# EAGLE board cpu2 (EAGLE 5.00)
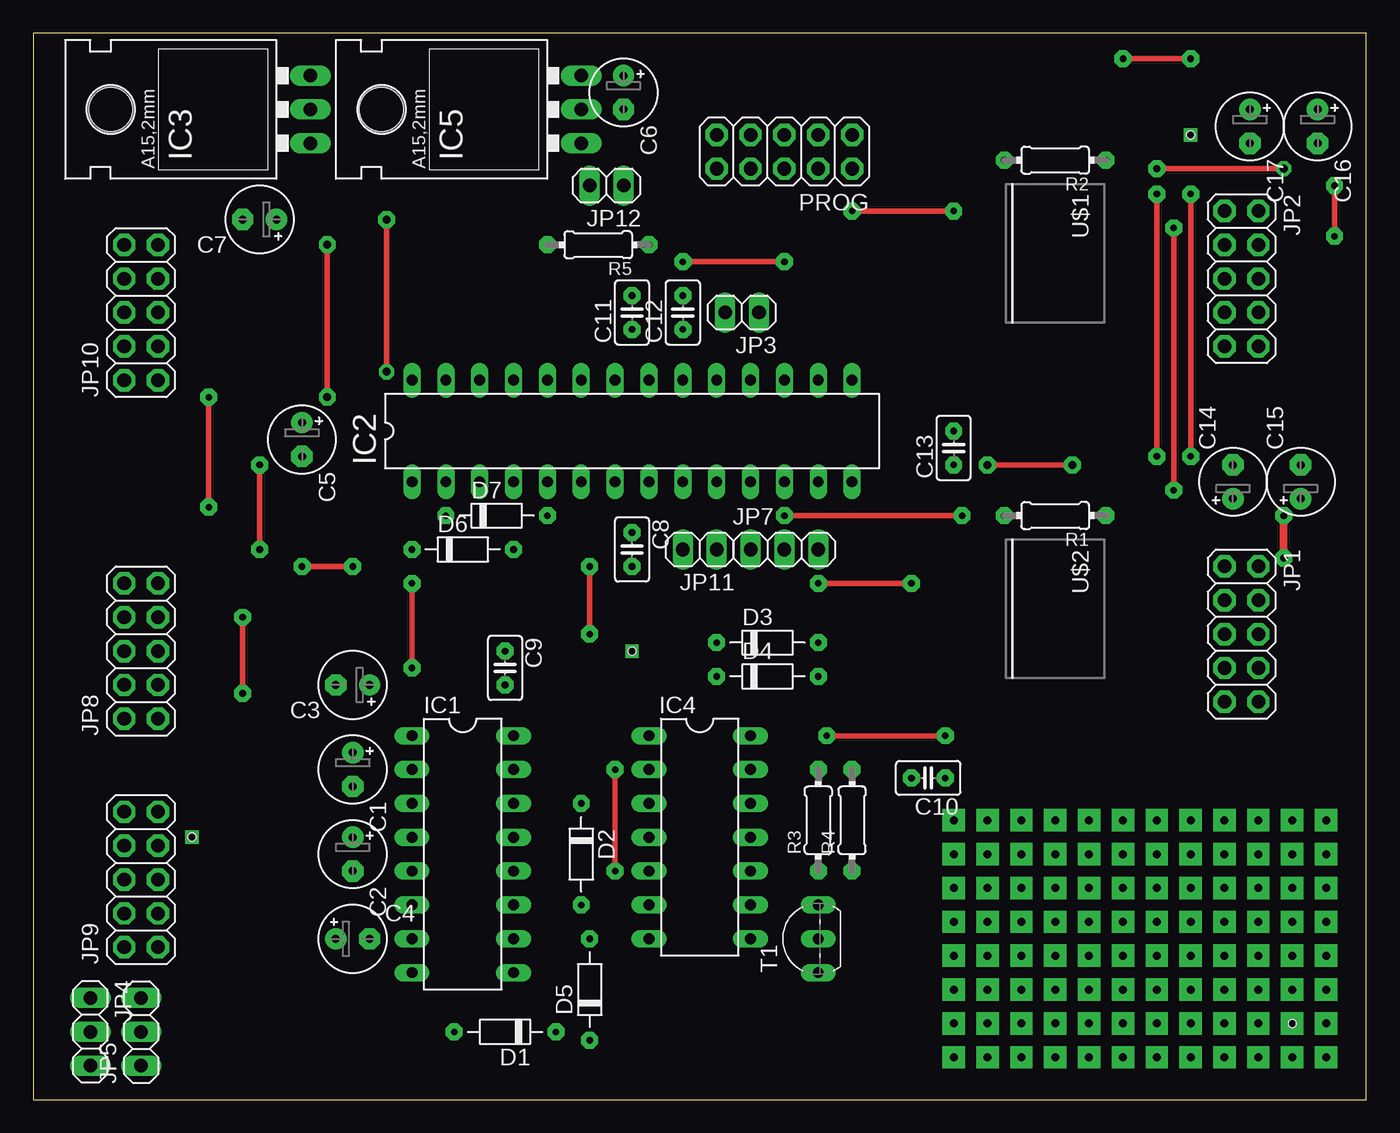
[diagram p0: board, top side]
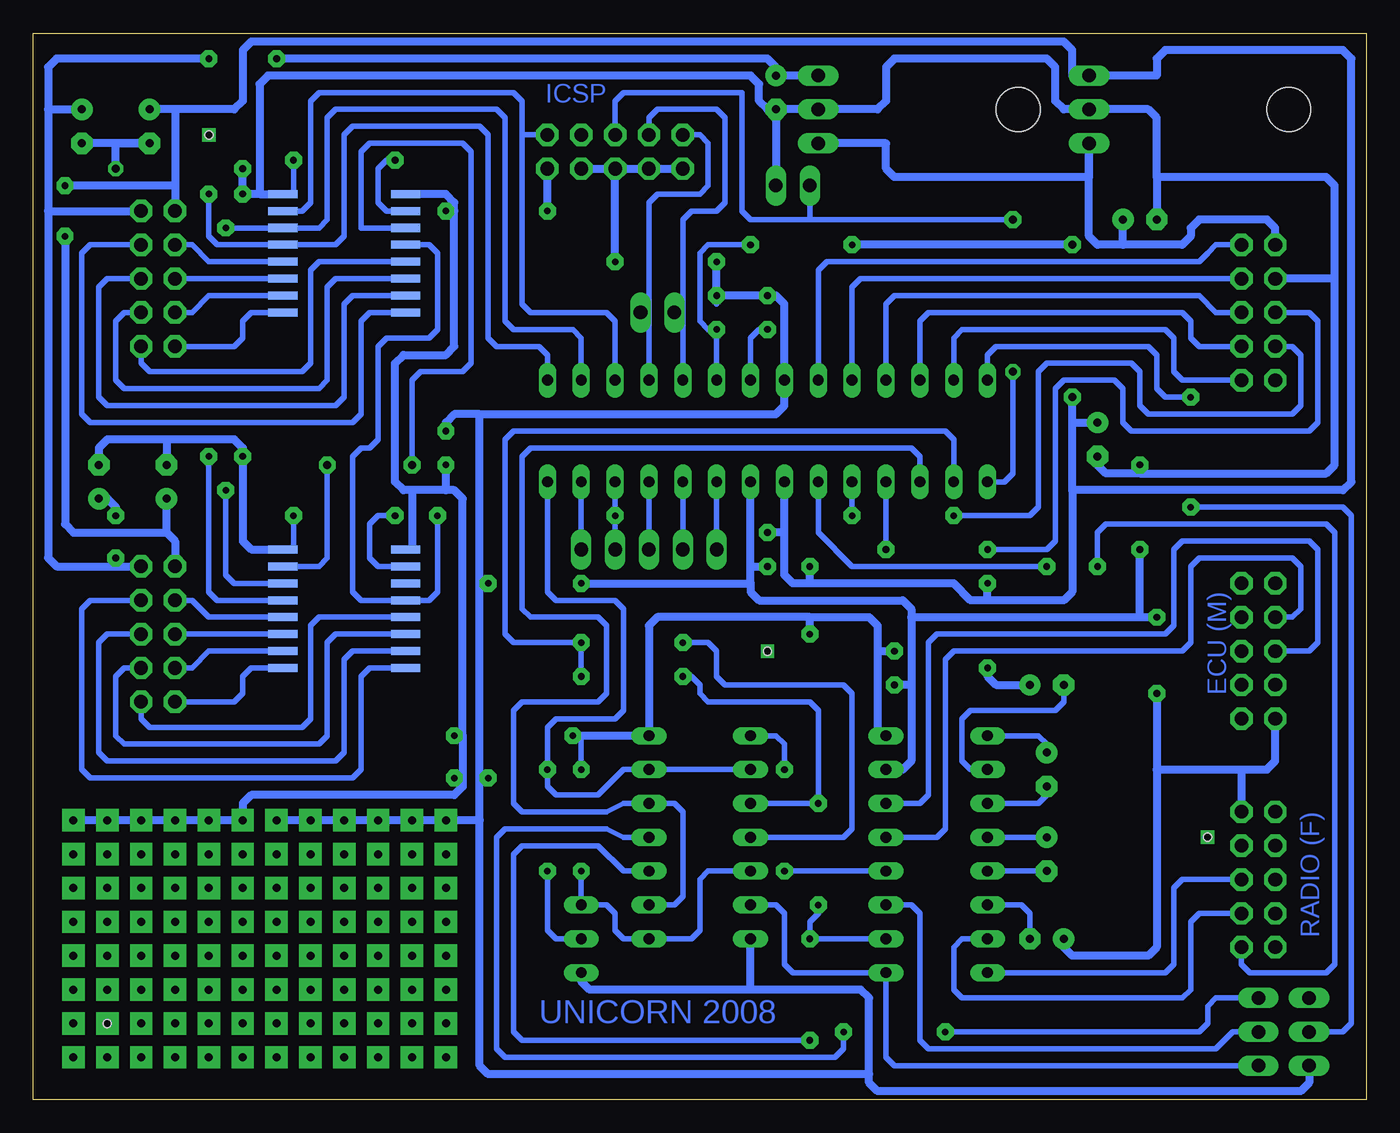
[diagram p1: board, bottom side, seen from below]

Size 100 x 80 mm. Coordinates in mm from the lower left corner, seen from the top.
Outline: 0,0 100,0 100,80 0,80 0,0
Copper layers (1*16): Top 0.035mm / dielectric 1.5mm / Bottom 0.035mm
Design rules "default": minimum track width 10mil, minimum drill 24mil, track to track 8mil, track to pad 8mil, pad to pad 8mil, via to via 8mil, smd to smd 8mil, copper to edge 40mil, drill to drill 8mil, minimum pad ring 10mil, minimum via ring 8mil, stop-mask expansion 4mil, vias tented up to drill 0mil, thermal gap 10mil
Holes 0.6 mm at 94.45,5.71 86.83,72.38 44.92,33.65 11.9,19.68

## Footprints (pad centres in the part's own frame; a part is rotated, then mirrored left to right if it is on the bottom)
E2,5-5 = drill 0.6 pad 1.6 round: + -1.27,0 | drill 0.6 pad 1.6 octagon: - 1.27,0
C025-025X050 = drill 0.5 pad 1.27 octagon: 1 -1.27,0; 2 1.27,0
D-7.5 = drill 0.5 pad 1.27 octagon: A 3.81,0; C -3.81,0
DIL16 = drill 0.813 long: 1 -8.89,-3.81; 2 -6.35,-3.81; 3 -3.81,-3.81; 4 -1.27,-3.81; 5 1.27,-3.81; 6 3.81,-3.81; 7 6.35,-3.81; 8 8.89,-3.81; 9 8.89,3.81; 10 6.35,3.81; 11 3.81,3.81; 12 1.27,3.81; 13 -1.27,3.81; 14 -3.81,3.81; 15 -6.35,3.81; 16 -8.89,3.81
DIL28-3 = drill 0.813 long: 1 -16.51,-3.81; 2 -13.97,-3.81; 3 -11.43,-3.81; 4 -8.89,-3.81; 5 -6.35,-3.81; 6 -3.81,-3.81; 7 -1.27,-3.81; 8 1.27,-3.81; 9 3.81,-3.81; 10 6.35,-3.81; 11 8.89,-3.81; 12 11.43,-3.81; 13 13.97,-3.81; 14 16.51,-3.81; 15 16.51,3.81; 16 13.97,3.81; 17 11.43,3.81; 18 8.89,3.81; 19 6.35,3.81; 20 3.81,3.81; 21 1.27,3.81; 22 -1.27,3.81; 23 -3.81,3.81; 24 -6.35,3.81; 25 -8.89,3.81; 26 -11.43,3.81; 27 -13.97,3.81; 28 -16.51,3.81
78XXL = drill 1.016 long: GND 0,-3.81; IN -2.54,-3.81; OUT 2.54,-3.81 | hole 3.302: 0,11.176
DIL14 = drill 0.813 long: 1 -7.62,-3.81; 2 -5.08,-3.81; 3 -2.54,-3.81; 4 0,-3.81; 5 2.54,-3.81; 6 5.08,-3.81; 7 7.62,-3.81; 8 7.62,3.81; 9 5.08,3.81; 10 2.54,3.81; 11 0,3.81; 12 -2.54,3.81; 13 -5.08,3.81; 14 -7.62,3.81
2X05 = drill 1.016 pad 1.676 octagon: 1 -5.08,-1.27; 2 -5.08,1.27; 3 -2.54,-1.27; 4 -2.54,1.27; 5 0,-1.27; 6 0,1.27; 7 2.54,-1.27; 8 2.54,1.27; 9 5.08,-1.27; 10 5.08,1.27
1X02 = drill 1.016 long: 1 -1.27,0; 2 1.27,0
1X03 = drill 1.016 long: 1 -2.54,0; 2 0,0; 3 2.54,0
0204/7 = drill 0.5 pad 1.27 octagon: 1 -3.81,0; 2 3.81,0
TO92-EBC = drill 0.813 long: B 0,-1.27; C 2.54,-1.27; E -2.54,-1.27
WSOIC16-INV = smd 0.6 x 2.2 bottom: 1 -4.445,-4.6; 2 -3.175,-4.6; 3 -1.905,-4.6; 4 -0.635,-4.6; 5 0.635,-4.6; 6 1.905,-4.6; 7 3.175,-4.6; 8 4.445,-4.6; 9 4.445,4.6; 10 3.175,4.6; 11 1.905,4.6; 12 0.635,4.6; 13 -0.635,4.6; 14 -1.905,4.6; 15 -3.175,4.6; 16 -4.445,4.6

## Placement (x,y rotation side)
C1  [E2,5-5]  23.96,24.76 270 top
C2  [E2,5-5]  23.96,18.41 270 top
C3  [E2,5-5]  23.96,31.11 180 top
C4  [E2,5-5]  23.96,12.06 0 top
C5  [E2,5-5]  20.15,49.53 270 top
C6  [E2,5-5]  44.28,75.56 270 top
C7  [E2,5-5]  16.98,66.03 180 top
C8  [C025-025X050]  44.92,41.27 270 top
C9  [C025-025X050]  35.39,32.38 270 top
C10  [C025-025X050]  67.14,24.12 180 top
C11  [C025-025X050]  44.92,59.05 90 top
C12  [C025-025X050]  48.73,59.05 90 top
C13  [C025-025X050]  69.05,48.89 90 top
C14  [E2,5-5]  90,46.35 90 top
C15  [E2,5-5]  95.08,46.35 90 top
C16  [E2,5-5]  96.36,73.02 270 top
C17  [E2,5-5]  91.28,73.02 270 top
D1  [D-7.5]  35.39,5.08 180 top
D2  [D-7.5]  41.11,18.41 270 top
D3  [D-7.5]  55.08,34.29 0 top
D4  [D-7.5]  55.08,31.74 0 top
D5  [D-7.5]  41.74,8.25 90 top
D6  [D-7.5]  32.22,41.27 0 top
D7  [D-7.5]  34.76,43.81 0 top
IC1  MAX232  [DIL16]  32.22,18.41 270 top
IC2  MEGA8-P  [DIL28-3]  44.92,50.16 0 top
IC3  5v  [78XXL]  16.98,74.29 90 top
IC4  4071N  [DIL14]  50,19.68 270 top
IC5  3.3v  [78XXL]  37.3,74.29 90 top
JP1  [2X05]  90.64,34.92 270 top
JP2  [2X05]  90.64,61.59 270 top
JP3  [1X02]  53.17,59.05 180 top
JP4  [1X03]  4.28,5.08 270 top
JP5  [1X03]  8.09,5.08 90 top
JP7  [1X03]  56.35,41.27 0 top
JP8  ECU (M)  [2X05]  8.09,33.65 90 top
JP9  RADIO (F)  [2X05]  8.09,16.5 90 top
JP10  [2X05]  8.09,59.05 90 top
JP11  [1X02]  50,41.27 180 top
JP12  [1X02]  43.02,68.57 180 top
PROG  [2X05]  56.35,71.11 180 top
R1  [0204/7]  76.67,43.81 180 top
R2  [0204/7]  76.67,70.48 180 top
R3  [0204/7]  58.89,20.95 90 top
R4  [0204/7]  61.43,20.95 90 top
R5  [0204/7]  42.38,64.13 180 top
T1  [TO92-EBC]  57.62,12.06 90 top
U$1  A6275BOTTOM  [WSOIC16-INV]  76.67,63.5 270 top
U$2  A6275BOTTOM  [WSOIC16-INV]  76.67,36.83 270 top

## Library data of the parts
C1-C17 R1-R5 = rcl
D1-D7 = diode
IC1 = maxim
IC2 = atmel
IC3 IC5 = v-reg
IC4 = 40xx
JP1-JP5 JP7-JP12 PROG = pinhead
T1 = transistor
U$1 U$2 = rnie04

## Nets
0V: C4.+ C5.- C6.- C7.- C8.2 C9.2 C10.2 C11.2 C12.2 C13.2 C14.- C15.- C16.- C17.- IC1.15 IC2.8 IC2.22 IC3.GND IC4.7 IC5.GND JP4.3 JP8.2 JP9.9 JP10.8 JP12.1 PROG.4 PROG.6 PROG.8 PROG.10 R1.1 R2.1 T1.E U$1.16 U$2.16
+3V3: C6.+ C15.+ C16.+ IC5.OUT JP1.2 JP2.2
+5V: C3.+ C5.+ C8.1 C9.1 C10.1 C13.1 C14.+ C17.+ IC1.16 IC2.7 IC3.OUT IC4.14 JP1.1 JP2.1 PROG.2 R3.2 R5.2 U$1.1 U$2.1
+12V: C7.+ IC3.IN IC5.IN JP10.10
N$1: C2.- IC1.5
N$2: C2.+ IC1.4
N$3: C1.- IC1.3
N$4: C1.+ IC1.1
N$5: U$1.3 U$2.15
N$6: IC2.17 PROG.1 U$1.15
N$7: IC2.16 U$1.14 U$2.14
N$8: IC2.15 U$1.13 U$2.13
N$9: IC2.12 JP7.2 U$1.4 U$2.4
N$10: R1.2 U$2.2
N$11: R2.2 U$1.2
N$12: C3.- IC1.2
N$13: C4.- IC1.6
N$14: D3.A D4.A IC2.2
N$15: IC2.3 IC4.9 IC4.12
N$16: D2.A D5.A IC1.10
N$17: D2.C D4.C IC4.3
N$18: D1.A JP5.3
N$19: D1.C IC4.11
N$20: IC1.12 IC4.1
N$21: IC2.14 IC4.2 IC4.13 R4.2
N$22: IC1.11 JP5.2
N$23: IC1.9 IC4.6 JP5.1
N$24: IC1.14 JP8.6
N$25: IC2.18 JP3.1 PROG.9
N$26: D3.C IC4.4
N$27: IC2.19 JP3.2 PROG.7
N$28: D5.C IC4.10
N$29: IC4.5 IC4.8 R3.1 T1.C
N$30: IC2.1 JP12.2 PROG.5
N$31: IC1.13 JP8.8
N$32: IC1.7 JP9.3
N$33: JP2.3 U$1.12
N$34: JP2.5 U$1.11
N$35: JP2.7 U$1.10
N$36: JP2.9 U$1.9
N$37: JP2.4 U$1.8
N$38: JP2.6 U$1.7
N$39: C11.1 IC2.21
N$40: C12.1 IC2.20 R5.1
N$41: JP1.9 U$2.9
N$42: JP1.7 U$2.10
N$43: JP1.5 U$2.11
N$44: JP1.3 U$2.12
N$45: JP1.10 U$2.5
N$46: JP1.8 U$2.6
N$47: JP1.6 U$2.7
N$48: JP1.4 U$2.8
N$49: IC2.24 JP10.7
N$50: IC2.27 JP10.1
N$51: IC2.26 JP10.3
N$52: IC2.25 JP10.5
N$53: IC2.23 JP10.9
N$54: D6.C JP10.6
N$55: D6.A IC2.4
N$56: D7.A IC2.5
N$57: IC2.6 JP9.1
N$58: IC2.11 JP7.1
N$59: IC2.9 JP11.2
N$60: IC2.13 JP7.3
N$61: R4.1 T1.B
N$62: IC1.8 JP9.5
N$63: JP2.10 U$1.5
N$64: JP2.8 U$1.6
N$65: IC2.10 JP11.1
N$151: D7.C JP10.4
N$152: IC2.28 JP4.2

## Tracks (layer width: path | path; a pad name or v marks a point on that pad's centre or on a via)
0V  (via drill 0.5 pad 1.27, 0.6 pad 1.14, 0.6 pad 1.68)
  Top 0.406: v84.29,67.94 v84.29,48.26 | v65.88,38.73 v58.89,38.73 | v48.73,62.86 v56.35,62.86 | v15.71,36.19 v15.71,30.47 | v84.29,69.84 v93.81,69.84 | v16.98,41.27 v16.98,47.62
  Bottom 0.406: PROG.10 PROG.8 PROG.6 | PROG.6 PROG.4 PROG.6 | 33.49,36.19 22.06,36.19 | 34.12,36.19 34.12,31.11 | U$2.16 80.48,41.27 R1.1 | U$1.16 80.48,67.94 R2.1 | 66.51,38.73 v65.88,38.73 | C12.2 48.73,59.69
  Bottom 0.61: 46.19,38.73 46.19,40 | 46.19,40 C8.2 | 46.19,40 IC2.8 | 34.12,36.19 34.12,36.83 34.76,37.46 45.55,37.46 46.19,38.1 46.19,38.73 | 46.19,8.25 58.25,8.25 58.89,8.89 T1.E | 80.48,41.27 83.66,41.27 84.29,41.91 v84.29,48.26 84.29,48.89 84.92,49.53 90,49.53 | 46.19,8.25 IC4.7 | v58.89,38.73 46.19,38.73 | 34.12,31.11 C9.2 | 83.02,67.94 v84.29,67.94 v84.29,69.84 | 83.02,67.94 80.48,67.94 | 66.51,51.43 44.28,51.43 43.65,52.07 IC2.22 43.65,59.69 44.28,60.32 C11.2 C12.2 v48.73,62.86 | 66.51,51.43 66.51,38.73 66.51,24.12 | 66.51,20.95 66.51,24.12 | 66.51,20.95 66.51,2.54 65.88,1.9 37.3,1.9 | 37.3,1.9 37.3,7.62 37.94,8.25 46.19,8.25 | PROG.4 PROG.10 | v56.35,62.86 PROG.6 | 9.36,24.76 JP9.9 | 15.71,24.76 9.36,24.76 | 15.71,24.76 15.71,11.43 16.34,10.79 22.06,10.79 22.7,11.43 C4.+ | 34.12,36.19 33.49,36.19 16.98,36.19 | 16.98,36.19 v15.71,36.19 | v15.71,30.47 15.71,24.76 | 66.51,24.12 C10.2 | 66.51,51.43 68.41,51.43 69.05,50.8 C13.2 | 66.51,20.95 v81.75,20.95 | 90,49.53 C14.- | 90,49.53 94.45,49.53 95.08,48.89 C15.- | C16.- C17.- 93.81,71.75 v93.81,69.84 | 34.12,36.19 34.12,25.39 34.76,24.76 IC1.15 | 2.38,61.59 JP10.8 | 2.38,61.59 2.38,68.57 3.01,69.21 15.71,69.21 | 15.71,69.21 15.71,73.66 16.34,74.29 IC3.GND 22.7,74.29 23.33,74.92 23.33,77.46 23.96,78.1 35.39,78.1 36.03,77.46 36.03,74.92 36.66,74.29 IC5.GND C6.- | C6.- JP12.1 | C6.- 44.92,74.29 45.55,74.92 45.55,76.19 46.19,76.83 82.39,76.83 83.02,76.19 83.02,67.94 | 2.38,61.59 2.38,47.62 3.01,46.98 16.98,46.98 | 16.98,36.19 v16.98,41.27 | 9.36,24.76 7.46,24.76 6.82,25.39 JP8.2 | v16.98,47.62 16.98,46.98 | 16.98,46.98 19.52,46.98 20.15,47.62 C5.- | 15.71,69.21 C7.-
  Bottom 0.61: JP4.3 4.28,1.27 4.92,0.63 36.66,0.63 37.3,1.27 37.3,1.9
+3V3  (via drill 0.5 pad 1.27)
  Top 0.406: v81.75,78.1 v86.83,78.1
  Top 0.61: v93.81,40.64 v93.81,43.81
  Bottom 0.61: 98.89,66.67 JP2.2 | 98.89,74.29 98.89,77.46 98.26,78.1 v86.83,78.1 | 98.89,74.29 98.89,66.67 | 93.81,40 JP1.2 | 98.89,66.67 98.89,40.64 98.26,40 93.81,40 | v93.81,43.81 93.81,44.45 94.45,45.08 C15.+ | 93.81,40 v93.81,40.64 | 98.89,74.29 C16.+ | IC5.OUT C6.+ 44.28,77.46 44.92,78.1 v81.75,78.1
+5V  (via drill 0.5 pad 1.27, 0.6 pad 1.27, 0.6 pad 1.68)
  Top 0.406: v22.06,52.7 v22.06,64.13 | v41.74,40 v41.74,34.92 | v97.62,68.57 v97.62,64.77 | v69.05,66.67 v61.43,66.67 | v59.52,27.3 v68.41,27.3 | v28.41,38.73 v28.41,32.38
  Bottom 0.406: v59.52,27.3 58.89,27.3 R3.2 | 71.59,41.27 U$2.1
  Bottom 0.61: 89.37,74.29 89.37,68.57 | 89.37,68.57 JP2.1 | v22.06,64.13 R5.2 | 41.74,38.73 43.02,38.73 43.65,39.37 43.65,42.54 | 43.65,42.54 C8.1 | 43.65,42.54 IC2.7 | 41.74,38.73 v41.74,40 | 41.74,38.73 30.95,38.73 29.68,37.46 28.41,37.46 | 28.41,37.46 22.7,37.46 22.06,38.1 22.06,45.72 | 22.06,45.72 22.06,50.8 | 22.06,50.8 v22.06,52.7 | IC1.16 36.66,27.3 36.66,33.65 | 41.74,36.19 37.3,36.19 36.66,35.55 36.66,33.65 | v41.74,34.92 41.74,36.19 | 41.74,36.19 53.17,36.19 53.81,35.55 IC4.14 v59.52,27.3 | 68.41,66.67 68.41,67.3 69.05,67.94 U$1.1 | 71.59,45.72 71.59,41.27 | 71.59,45.72 72.22,45.72 72.86,46.35 72.86,55.24 72.22,55.88 69.05,55.88 68.41,56.51 68.41,66.67 | 68.41,66.67 v69.05,66.67 | v97.62,64.77 97.62,43.18 96.99,42.54 90,42.54 | 90,42.54 89.37,41.91 JP1.1 | 89.37,68.57 v97.62,68.57 | 36.66,33.65 C9.1 | 67.78,27.3 67.78,45.08 68.41,45.72 69.05,45.72 | 69.05,45.72 71.59,45.72 | v61.43,66.67 PROG.2 | C3.+ 27.77,31.11 28.41,31.74 v28.41,32.38 | 28.41,37.46 v28.41,38.73 | 67.78,24.12 C10.1 | v68.41,27.3 67.78,27.3 | 67.78,27.3 67.78,24.12 | 69.05,45.72 C13.1 | v96.99,20.95 v84.29,20.95 84.29,22.22 83.66,22.86 68.41,22.86 67.78,23.49 67.78,24.12 | 90,42.54 C14.+ | 89.37,74.29 C17.+ | 89.37,74.29 84.92,74.29 84.29,74.92 84.29,78.73 83.66,79.37 22.7,79.37 22.06,78.73 22.06,76.83 IC3.OUT 15.71,76.83 15.71,78.1 15.08,78.73 1.74,78.73 1.1,78.1 1.1,46.35 1.74,45.72 22.06,45.72 | 22.06,50.8 C5.+
+12V
  Bottom 0.61: IC5.IN 36.03,71.75 36.03,69.84 35.39,69.21 20.79,69.21 IC3.IN 20.79,64.77 20.15,64.13 18.25,64.13 | JP10.10 6.82,65.4 7.46,66.03 12.54,66.03 13.17,65.4 13.17,64.77 13.81,64.13 18.25,64.13 | 18.25,64.13 C7.+
N$1
  Bottom 0.406: C2.- IC1.5
N$2
  Bottom 0.406: C2.+ IC1.4
N$3
  Bottom 0.406: IC1.3 24.6,22.22 23.96,22.86 C1.-
N$4
  Bottom 0.406: C1.+ 23.96,26.66 24.6,27.3 IC1.1
N$5  (via drill 0.6 pad 1.27)
  Top 0.406: v77.94,47.62 v71.59,47.62
  Bottom 0.406: U$2.15 78.58,40 77.94,40.64 v77.94,47.62 | U$1.3 75.4,65.4 75.4,71.11 74.77,71.75 67.78,71.75 67.14,71.11 67.14,55.24 67.78,54.61 70.95,54.61 71.59,53.97 v71.59,47.62
N$6
  Bottom 0.406: IC2.17 56.35,58.41 56.98,59.05 62.7,59.05 63.34,59.69 63.34,72.38 | 63.34,72.38 PROG.1 | U$1.15 79.84,66.67 79.21,67.3 79.21,74.92 78.58,75.56 63.97,75.56 63.34,74.92 63.34,72.38
N$7  (via drill 0.5 pad 1.27)
  Top 0.406: v85.56,65.4 v85.56,45.72
  Bottom 0.406: v85.56,45.72 85.56,39.37 84.92,38.73 U$2.14 | v85.56,65.4 U$1.14 78.58,65.4 77.94,66.03 77.94,73.66 77.3,74.29 65.24,74.29 64.61,73.66 64.61,58.41 63.97,57.78 59.52,57.78 58.89,57.15 IC2.16
N$8  (via drill 0.5 pad 1.27)
  Top 0.406: v86.83,67.94 v86.83,48.26
  Bottom 0.406: v86.83,48.26 86.83,38.1 86.19,37.46 U$2.13 | v86.83,67.94 86.83,64.77 86.19,64.13 U$1.13 77.3,64.13 76.67,64.77 76.67,72.38 76.03,73.02 66.51,73.02 65.88,72.38 65.88,57.15 65.24,56.51 62.06,56.51 61.43,55.88 IC2.15
N$9  (via drill 0.5 pad 1.27)
  Top 0.406: v56.35,43.81 v69.69,43.81
  Bottom 0.406: JP7.2 v56.35,43.81 IC2.12 | U$1.4 70.32,64.13 69.69,63.5 69.69,57.78 70.32,57.15 73.5,57.15 74.13,56.51 74.13,49.53 74.77,48.89 75.4,48.89 76.03,48.26 76.03,38.1 75.4,37.46 72.22,37.46 | 72.22,37.46 U$2.4 | v69.69,43.81 69.69,38.1 70.32,37.46 72.22,37.46
N$10
  Bottom 0.406: U$2.2 74.13,40 74.77,40.64 74.77,43.18 74.13,43.81 R1.2
N$11
  Bottom 0.406: U$1.2 73.5,66.67 74.13,67.3 74.13,69.84 73.5,70.48 R2.2
N$12
  Bottom 0.406: C3.- 22.7,29.84 23.33,29.2 29.68,29.2 30.31,28.57 30.31,25.39 29.68,24.76 IC1.2
N$13
  Bottom 0.406: C4.- 25.23,13.97 25.87,14.6 IC1.6
N$14
  Bottom 0.406: IC2.2 30.95,49.53 31.58,50.16 63.97,50.16 64.61,49.53 64.61,34.92 63.97,34.29 D3.A D4.A
N$15
  Bottom 0.406: IC2.3 33.49,48.26 34.12,48.89 62.7,48.89 63.34,48.26 63.34,36.83 62.7,36.19 57.62,36.19 56.98,35.55 56.98,30.47 57.62,29.84 63.34,29.84 63.97,29.2 63.97,22.22 63.34,21.58 56.98,21.58 55.71,22.22 IC4.12 51.91,22.22 51.27,21.58 51.27,15.24 51.91,14.6 IC4.9
N$16
  Bottom 0.406: IC1.10 D5.A 41.74,13.33 41.11,13.97 D2.A
N$17
  Bottom 0.406: D4.C 50.63,31.74 50,31.11 50,30.47 49.37,29.84 41.74,29.84 41.11,29.2 D2.C IC4.3
N$18
  Bottom 0.406: JP5.3 11.27,7.62 11.9,6.98 11.9,5.71 12.54,5.08 D1.A
N$19
  Bottom 0.406: IC4.11 55.71,19.68 56.98,20.31 64.61,20.31 65.24,19.68 65.24,3.8 64.61,3.17 39.84,3.17 39.2,3.8 D1.C
N$20  (via drill 0.5 pad 1.27)
  Top 0.406: v43.65,17.14 v43.65,24.76
  Bottom 0.406: IC1.12 v43.65,17.14 | v43.65,24.76 43.65,26.66 44.28,27.3 IC4.1
N$21
  Bottom 0.406: IC4.2 IC4.13 55.71,24.76 57.62,22.86 60.8,22.86 61.43,23.49 R4.2 61.43,27.93 60.8,28.57 56.35,28.57 55.71,29.2 55.71,36.83 56.35,37.46 60.8,37.46 61.43,38.1 IC2.14
N$22
  Bottom 0.406: JP5.2 10,5.08 11.27,3.8 32.85,3.8 33.49,4.44 33.49,13.97 34.12,14.6 IC1.11
N$23
  Bottom 0.406: IC4.6 44.28,14.6 43.65,13.97 43.65,10.16 43.02,9.52 IC1.9 36.03,3.17 35.39,2.54 JP5.1
N$24
  Bottom 0.406: JP8.6 4.28,33.65 3.64,34.29 3.64,41.27 4.28,41.91 13.81,41.91 14.44,41.27 14.44,35.55 15.08,34.92 32.22,34.92 32.85,34.29 32.85,22.86 33.49,22.22 IC1.14
N$25
  Bottom 0.406: 53.81,59.05 53.81,67.3 53.17,67.94 50,67.94 49.37,68.57 49.37,71.75 50,72.38 PROG.9 | IC2.18 53.81,59.05 | 53.81,59.05 JP3.1
N$26
  Bottom 0.406: D3.C 49.37,34.29 48.73,33.65 48.73,31.74 48.09,31.11 39.2,31.11 38.57,30.47 38.57,20.31 39.2,19.68 IC4.4
N$27
  Bottom 0.406: 51.27,59.05 51.27,66.03 50.63,66.67 48.73,66.67 48.09,67.3 48.09,73.66 48.73,74.29 53.17,74.29 53.81,73.66 PROG.7 | 51.27,59.05 JP3.2 | IC2.19 51.27,59.05
N$28
  Bottom 0.406: IC4.10 55.71,17.14 57.62,19.04 63.34,19.04 63.97,18.41 63.97,5.08 63.34,4.44 D5.C
N$29
  Bottom 0.406: IC4.5 49.37,17.14 50,16.5 50,12.7 50.63,12.06 IC4.8 55.71,12.06 56.35,12.7 56.35,13.97 56.98,14.6 T1.C R3.1
N$30  (via drill 0.6 pad 1.14, 0.6 pad 1.27)
  Top 0.406: v26.5,54.61 v26.5,66.03
  Bottom 0.406: PROG.5 56.35,74.92 55.71,75.56 46.82,75.56 46.82,66.67 46.19,66.03 41.74,66.03 | IC2.1 27.14,46.35 26.5,46.98 v26.5,54.61 | v26.5,66.03 41.74,66.03 | 41.74,66.03 JP12.2
N$31
  Bottom 0.406: JP8.8 5.55,36.19 4.92,36.83 4.92,40 5.55,40.64 12.54,40.64 13.17,40 13.17,34.29 13.81,33.65 30.95,33.65 31.58,33.02 31.58,20.31 32.22,19.68 IC1.13
N$32
  Bottom 0.406: JP9.3 12.54,13.97 13.17,13.33 13.17,8.25 13.81,7.62 30.31,7.62 30.95,8.25 30.95,11.43 30.31,12.06 IC1.7
N$33
  Bottom 0.406: U$1.12 86.83,62.86 88.1,64.13 JP2.3
N$34
  Bottom 0.406: U$1.11 JP2.5
N$35
  Bottom 0.406: U$1.10 86.83,60.32 88.1,59.05 JP2.7
N$36
  Bottom 0.406: U$1.9 83.66,59.05 84.29,58.41 84.29,57.15 84.92,56.51 JP2.9
N$37
  Bottom 0.406: U$1.8 74.77,59.05 75.4,58.41 75.4,51.43 76.03,50.8 95.72,50.8 96.36,51.43 96.36,63.5 95.72,64.13 JP2.4
N$38
  Bottom 0.406: U$1.7 76.03,60.32 76.67,59.69 76.67,52.7 77.3,52.07 94.45,52.07 95.08,52.7 95.08,60.96 94.45,61.59 JP2.6
N$39
  Bottom 0.406: C11.1 45.55,57.78 46.19,57.15 IC2.21
N$40
  Bottom 0.406: IC2.20 C12.1 49.37,57.78 50,58.41 50,63.5 49.37,64.13 R5.1
N$41
  Bottom 0.406: U$2.9 83.66,32.38 84.29,31.74 84.29,30.47 84.92,29.84 JP1.9
N$42
  Bottom 0.406: U$2.10 86.83,33.65 88.1,32.38 JP1.7
N$43
  Bottom 0.406: U$2.11 JP1.5
N$44
  Bottom 0.406: U$2.12 86.83,36.19 88.1,37.46 JP1.3
N$45
  Bottom 0.406: U$2.5 78.58,36.19 79.21,35.55 79.21,28.57 79.84,27.93 91.28,27.93 91.91,28.57 JP1.10
N$46
  Bottom 0.406: U$2.6 77.3,34.92 77.94,34.29 77.94,27.3 78.58,26.66 93.18,26.66 93.81,27.3 93.81,31.74 93.18,32.38 JP1.8
N$47
  Bottom 0.406: U$2.7 76.03,33.65 76.67,33.02 76.67,26.03 77.3,25.39 94.45,25.39 95.08,26.03 95.08,34.29 94.45,34.92 JP1.6
N$48
  Bottom 0.406: U$2.8 74.77,32.38 75.4,31.74 75.4,24.76 76.03,24.12 95.72,24.12 96.36,24.76 96.36,36.83 95.72,37.46 JP1.4
N$49
  Bottom 0.406: JP10.7 37.94,61.59 38.57,60.96 IC2.24
N$50
  Bottom 0.406: JP10.1 13.81,53.97 14.44,54.61 14.44,57.15 15.08,57.78 30.31,57.78 30.95,57.15 IC2.27
N$51
  Bottom 0.406: JP10.3 12.54,56.51 13.17,57.15 13.17,58.41 13.81,59.05 32.85,59.05 33.49,58.41 IC2.26
N$52
  Bottom 0.406: JP10.5 11.27,59.05 12.54,60.32 35.39,60.32 36.03,59.69 IC2.25
N$53
  Bottom 0.406: JP10.9 11.27,64.13 11.9,63.5 12.54,62.86 40.48,62.86 41.11,62.23 IC2.23
N$54
  Bottom 0.406: JP10.6 4.28,59.05 3.64,58.41 3.64,50.8 4.28,50.16 17.61,50.16 18.25,50.8 18.25,53.34 18.88,53.97 22.7,53.97 23.33,53.34 23.33,41.91 23.96,41.27 D6.C
N$55
  Bottom 0.406: D6.A IC2.4
N$56
  Bottom 0.406: D7.A IC2.5
N$57  (via drill 0.5 pad 1.27)
  Top 0.406: v20.15,40 v23.96,40
  Bottom 0.406: v23.96,40 38.57,40 41.11,42.54 IC2.6 | v20.15,40 20.15,42.54 19.52,43.18 3.01,43.18 2.38,42.54 2.38,10.16 3.01,9.52 8.73,9.52 9.36,10.16 JP9.1
N$58
  Bottom 0.406: JP7.1 IC2.11
N$59
  Bottom 0.406: JP11.2 IC2.9
N$60
  Bottom 0.406: JP7.3 IC2.13
N$61
  Bottom 0.406: T1.B 60.8,12.06 61.43,12.7 R4.1
N$62
  Bottom 0.406: JP9.5 13.81,16.5 14.44,15.87 14.44,10.16 15.08,9.52 IC1.8
N$63
  Bottom 0.406: U$1.5 78.58,62.86 79.21,62.23 79.21,55.24 79.84,54.61 91.28,54.61 91.91,55.24 JP2.10
N$64
  Bottom 0.406: U$1.6 77.3,61.59 77.94,60.96 77.94,53.97 78.58,53.34 93.18,53.34 93.81,53.97 93.81,58.41 93.18,59.05 JP2.8
N$65
  Bottom 0.406: JP11.1 IC2.10
N$66  (via drill 0.6 pad 1.68)
  other vias: 71.59,15.87
N$67  (via drill 0.6 pad 1.68)
  other vias: 74.13,15.87
N$68  (via drill 0.6 pad 1.68)
  other vias: 71.59,13.33
N$69  (via drill 0.6 pad 1.68)
  other vias: 74.13,13.33
N$70  (via drill 0.6 pad 1.68)
  other vias: 71.59,10.79
N$71  (via drill 0.6 pad 1.68)
  other vias: 74.13,10.79
N$72  (via drill 0.6 pad 1.68)
  other vias: 71.59,8.25
N$73  (via drill 0.6 pad 1.68)
  other vias: 74.13,8.25
N$74  (via drill 0.6 pad 1.68)
  other vias: 74.13,5.71
N$75  (via drill 0.6 pad 1.68)
  other vias: 71.59,5.71
N$76  (via drill 0.6 pad 1.68)
  other vias: 71.59,3.17
N$77  (via drill 0.6 pad 1.68)
  other vias: 74.13,3.17
N$78  (via drill 0.6 pad 1.68)
  other vias: 76.67,3.17
N$79  (via drill 0.6 pad 1.68)
  other vias: 76.67,5.71
N$80  (via drill 0.6 pad 1.68)
  other vias: 76.67,8.25
N$81  (via drill 0.6 pad 1.68)
  other vias: 76.67,10.79
N$82  (via drill 0.6 pad 1.68)
  other vias: 76.67,13.33
N$83  (via drill 0.6 pad 1.68)
  other vias: 76.67,15.87
N$84  (via drill 0.6 pad 1.68)
  other vias: 71.59,18.41
N$85  (via drill 0.6 pad 1.68)
  other vias: 74.13,18.41
N$86  (via drill 0.6 pad 1.68)
  other vias: 76.67,18.41
N$87  (via drill 0.6 pad 1.68)
  other vias: 69.05,18.41
N$88  (via drill 0.6 pad 1.68)
  other vias: 69.05,15.87
N$89  (via drill 0.6 pad 1.68)
  other vias: 69.05,13.33
N$90  (via drill 0.6 pad 1.68)
  other vias: 69.05,10.79
N$91  (via drill 0.6 pad 1.68)
  other vias: 69.05,8.25
N$92  (via drill 0.6 pad 1.68)
  other vias: 69.05,5.71
N$93  (via drill 0.6 pad 1.68)
  other vias: 69.05,3.17
N$94  (via drill 0.6 pad 1.68)
  other vias: 81.75,15.87
N$95  (via drill 0.6 pad 1.68)
  other vias: 84.29,15.87
N$96  (via drill 0.6 pad 1.68)
  other vias: 81.75,13.33
N$97  (via drill 0.6 pad 1.68)
  other vias: 84.29,13.33
N$98  (via drill 0.6 pad 1.68)
  other vias: 81.75,10.79
N$99  (via drill 0.6 pad 1.68)
  other vias: 84.29,10.79
N$100  (via drill 0.6 pad 1.68)
  other vias: 81.75,8.25
N$101  (via drill 0.6 pad 1.68)
  other vias: 84.29,8.25
N$102  (via drill 0.6 pad 1.68)
  other vias: 84.29,5.71
N$103  (via drill 0.6 pad 1.68)
  other vias: 81.75,5.71
N$104  (via drill 0.6 pad 1.68)
  other vias: 81.75,3.17
N$105  (via drill 0.6 pad 1.68)
  other vias: 84.29,3.17
N$106  (via drill 0.6 pad 1.68)
  other vias: 86.83,3.17
N$107  (via drill 0.6 pad 1.68)
  other vias: 86.83,5.71
N$108  (via drill 0.6 pad 1.68)
  other vias: 86.83,8.25
N$109  (via drill 0.6 pad 1.68)
  other vias: 86.83,10.79
N$110  (via drill 0.6 pad 1.68)
  other vias: 86.83,13.33
N$111  (via drill 0.6 pad 1.68)
  other vias: 86.83,15.87
N$112  (via drill 0.6 pad 1.68)
  other vias: 81.75,18.41
N$113  (via drill 0.6 pad 1.68)
  other vias: 84.29,18.41
N$114  (via drill 0.6 pad 1.68)
  other vias: 86.83,18.41
N$115  (via drill 0.6 pad 1.68)
  other vias: 79.21,18.41
N$116  (via drill 0.6 pad 1.68)
  other vias: 79.21,15.87
N$117  (via drill 0.6 pad 1.68)
  other vias: 79.21,13.33
N$118  (via drill 0.6 pad 1.68)
  other vias: 79.21,10.79
N$119  (via drill 0.6 pad 1.68)
  other vias: 79.21,8.25
N$120  (via drill 0.6 pad 1.68)
  other vias: 79.21,5.71
N$121  (via drill 0.6 pad 1.68)
  other vias: 79.21,3.17
N$122  (via drill 0.6 pad 1.68)
  other vias: 91.91,15.87
N$123  (via drill 0.6 pad 1.68)
  other vias: 94.45,15.87
N$124  (via drill 0.6 pad 1.68)
  other vias: 91.91,13.33
N$125  (via drill 0.6 pad 1.68)
  other vias: 94.45,13.33
N$126  (via drill 0.6 pad 1.68)
  other vias: 91.91,10.79
N$127  (via drill 0.6 pad 1.68)
  other vias: 94.45,10.79
N$128  (via drill 0.6 pad 1.68)
  other vias: 91.91,8.25
N$129  (via drill 0.6 pad 1.68)
  other vias: 94.45,8.25
N$130  (via drill 0.6 pad 1.68)
  other vias: 94.45,5.71
N$131  (via drill 0.6 pad 1.68)
  other vias: 91.91,5.71
N$132  (via drill 0.6 pad 1.68)
  other vias: 91.91,3.17
N$133  (via drill 0.6 pad 1.68)
  other vias: 94.45,3.17
N$134  (via drill 0.6 pad 1.68)
  other vias: 96.99,3.17
N$135  (via drill 0.6 pad 1.68)
  other vias: 96.99,5.71
N$136  (via drill 0.6 pad 1.68)
  other vias: 96.99,8.25
N$137  (via drill 0.6 pad 1.68)
  other vias: 96.99,10.79
N$138  (via drill 0.6 pad 1.68)
  other vias: 96.99,13.33
N$139  (via drill 0.6 pad 1.68)
  other vias: 96.99,15.87
N$140  (via drill 0.6 pad 1.68)
  other vias: 91.91,18.41
N$141  (via drill 0.6 pad 1.68)
  other vias: 94.45,18.41
N$142  (via drill 0.6 pad 1.68)
  other vias: 96.99,18.41
N$143  (via drill 0.6 pad 1.68)
  other vias: 89.37,18.41
N$144  (via drill 0.6 pad 1.68)
  other vias: 89.37,15.87
N$145  (via drill 0.6 pad 1.68)
  other vias: 89.37,13.33
N$146  (via drill 0.6 pad 1.68)
  other vias: 89.37,10.79
N$147  (via drill 0.6 pad 1.68)
  other vias: 89.37,8.25
N$148  (via drill 0.6 pad 1.68)
  other vias: 89.37,5.71
N$149  (via drill 0.6 pad 1.68)
  other vias: 89.37,3.17
N$150  (via drill 0.6)
  other vias: 86.83,72.38
N$151
  Bottom 0.406: JP10.4 5.55,56.51 4.92,55.88 4.92,52.07 5.55,51.43 16.34,51.43 16.98,52.07 16.98,54.61 17.61,55.24 23.96,55.24 24.6,54.61 24.6,44.45 25.23,43.81 D7.C
N$152  (via drill 0.5 pad 1.27)
  Top 0.406: v13.17,44.45 v13.17,52.7
  Bottom 0.406: IC2.28 28.41,55.88 27.77,56.51 16.34,56.51 15.71,55.88 15.71,53.34 15.08,52.7 v13.17,52.7 | v13.17,44.45 1.74,44.45 1.1,43.81 1.1,5.71 1.74,5.08 JP4.2
N$153  (via drill 0.6)
  other vias: 5.55,74.29
N$154  (via drill 0.6)
  other vias: 25.87,74.29
N$175  (via drill 0.6 pad 1.68)
  other vias: 69.05,20.95
N$176  (via drill 0.6 pad 1.68)
  other vias: 71.59,20.95
N$177  (via drill 0.6 pad 1.68)
  other vias: 74.13,20.95
N$178  (via drill 0.6 pad 1.68)
  other vias: 76.67,20.95
N$179  (via drill 0.6 pad 1.68)
  other vias: 79.21,20.95
N$181  (via drill 0.6)
  other vias: 44.92,33.65
N$182  (via drill 0.6 pad 1.68)
  other vias: 86.83,20.95
N$183  (via drill 0.6 pad 1.68)
  other vias: 89.37,20.95
N$184  (via drill 0.6 pad 1.68)
  other vias: 91.91,20.95
N$185  (via drill 0.6 pad 1.68)
  other vias: 94.45,20.95
N$186  (via drill 0.6)
  other vias: 11.9,19.68

## Text on the board
Bottom: ICSP | ECU (M) | RADIO (F) | UNICORN 2008